# EAGLE board LEDtestBoard (EAGLE 6.4)
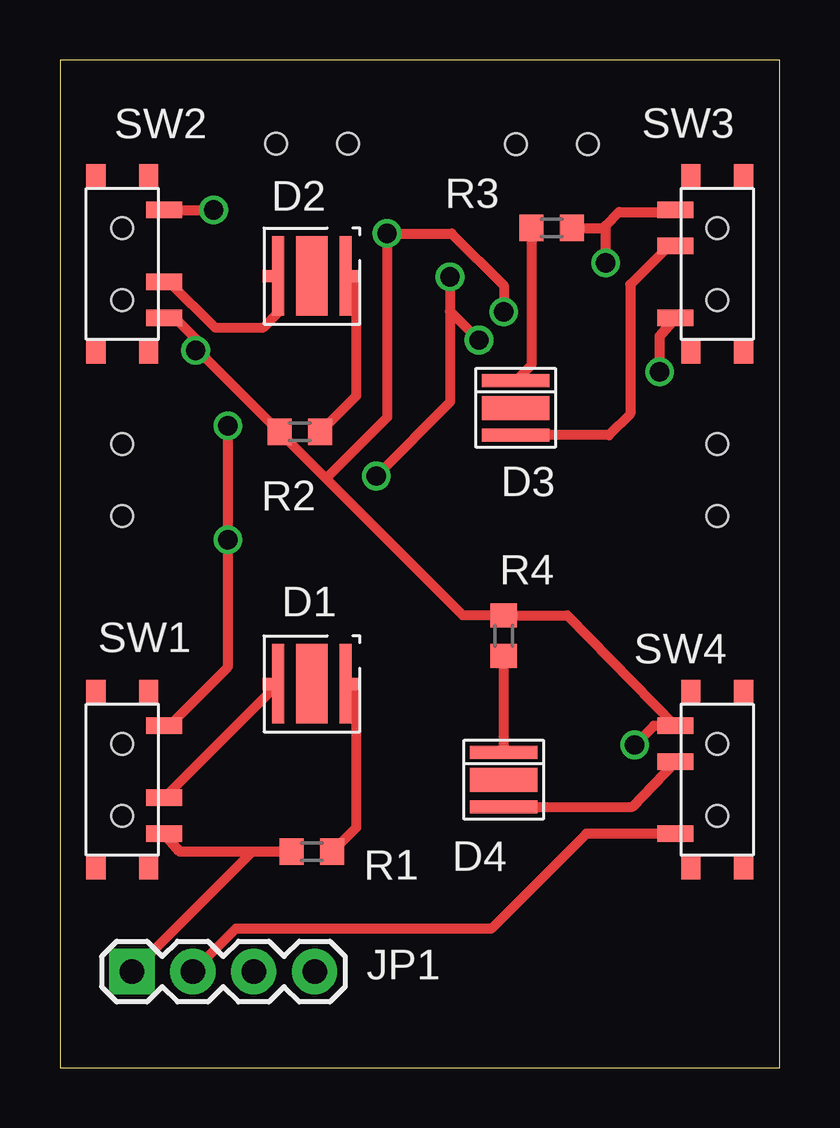
[diagram p0: board, top side]
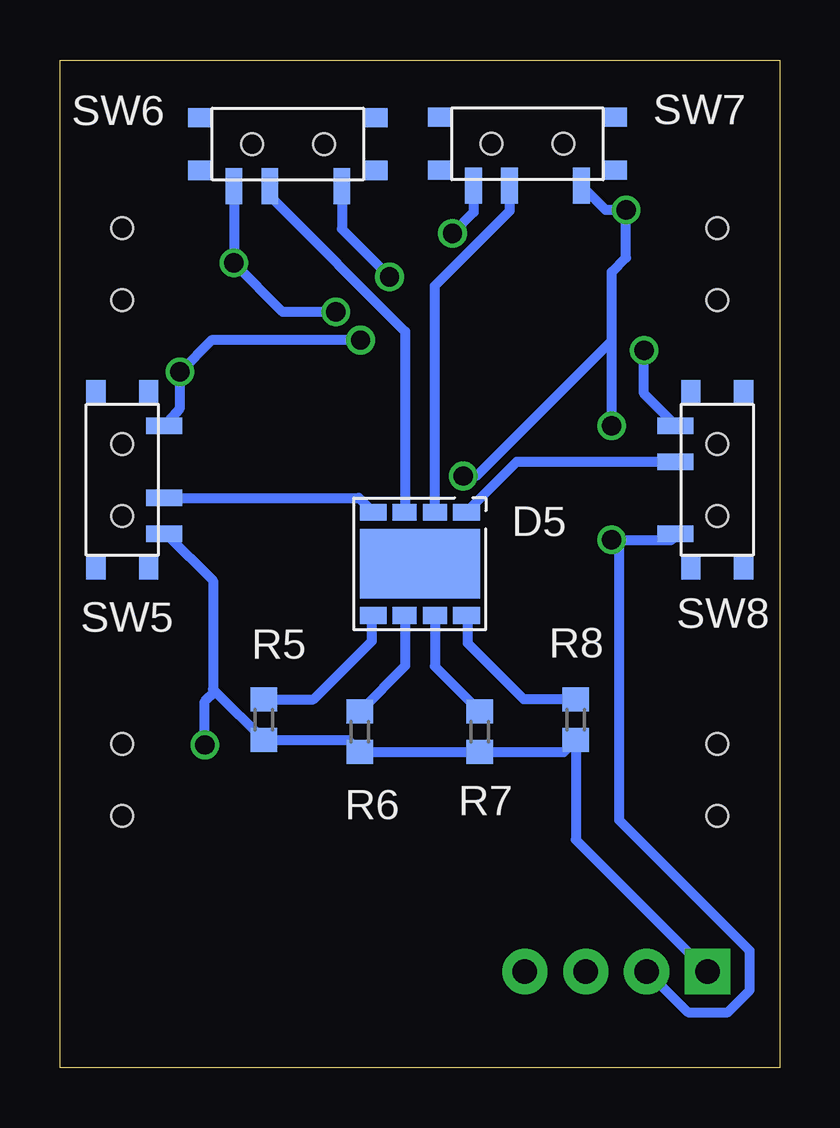
[diagram p1: board, bottom side, seen from below]

Size 30 x 42 mm. Coordinates in mm from the lower left corner, seen from the top.
Outline: 0,0 30,0 30,42 0,42 0,0
Copper layers (1*16): Top 0.0356mm / dielectric 1.5011mm / Bottom 0.0356mm
Design rules "LaenPCBOrder": minimum track width 6mil, minimum drill 13mil, track to track 6mil, track to pad 6mil, pad to pad 6mil, via to via 6mil, smd to smd 6mil, copper to edge 15mil, drill to drill 6mil, minimum pad ring 7mil, minimum via ring 7mil, stop-mask expansion 3mil, vias tented up to drill 0mil, thermal gap 10mil

## Footprints (pad centres in the part's own frame; a part is rotated, then mirrored left to right if it is on the bottom)
SZA05A0A = smd 0.5 x 3.3: 1 -1.4,0; 2 1.4,0 | smd 1.3 x 3.3: 3 0,0 | smd 0.4 x 0.5: 11 -1.85,0; 12 1.85,0
2-SMD-LED-NO-EXP = smd 2.8 x 0.55: 1 0,1.13; 2 0,-1.13 | smd 2.8 x 1: THRM 0,0
8-SMD-LED = smd 0.7 x 1.12: 1 2.15,1.94; 4 2.15,-1.94; 5 -2.15,-1.94; 8 -2.15,1.94 | smd 0.7 x 1: 2 2.15,0.63; 3 2.15,-0.63; 6 -2.15,-0.63; 7 -2.15,0.63 | smd 2.9 x 5: THRM 0,0
1X04 = drill 1.016 pad 1.88 square: 1 0,0 | drill 1.016 pad 1.88: 2 2.54,0; 3 5.08,0; 4 7.62,0
R0603 = smd 1 x 1.1: 1 -0.85,0; 2 0.85,0
PCM12SMTR = smd 0.7 x 1.5: 1 -2.25,1.75; 2 0.75,1.75; 3 2.25,1.75 | smd 1 x 0.8: 4 -3.65,1.1; 5 -3.65,-1.1; 6 3.65,1.1; 7 3.65,-1.1 | hole 0.9: -1.5,0; 1.5,0

## Placement (x,y rotation side)
D1  SZA05A0A  [SZA05A0A]  10.5,16 0 top
D2  SZA05A0A  [SZA05A0A]  10.5,33 0 top
D3  LACN5MFBGB241Z  [2-SMD-LED-NO-EXP]  19,27.5 180 top
D4  LACN5MFBGB241Z  [2-SMD-LED-NO-EXP]  18.5,12 180 top
D5  XLAMP_COLOR  [8-SMD-LED]  15,21 90 bottom
JP1  [1X04]  3,4 0 top
R1  [R0603]  10.5,9 0 top
R2  [R0603]  10,26.5 0 top
R3  [R0603]  20.5,35 180 top
R4  [R0603]  18.5,18 270 top
R5  [R0603]  21.5,14.5 90 bottom
R6  [R0603]  17.5,14 90 bottom
R7  [R0603]  12.5,14 90 bottom
R8  [R0603]  8.5,14.5 90 bottom
SW1  PCM12SMTR  [PCM12SMTR]  2.6,12 270 top
SW2  PCM12SMTR  [PCM12SMTR]  2.6,33.5 270 top
SW3  PCM12SMTR  [PCM12SMTR]  27.4,33.5 90 top
SW4  PCM12SMTR  [PCM12SMTR]  27.4,12 90 top
SW5  PCM12SMTR  [PCM12SMTR]  27.4,24.5 270 bottom
SW6  PCM12SMTR  [PCM12SMTR]  20.5,38.5 180 bottom
SW7  PCM12SMTR  [PCM12SMTR]  10.51,38.51 180 bottom
SW8  PCM12SMTR  [PCM12SMTR]  2.6,24.5 90 bottom

## Library data of the parts
D1-D5 SW1-SW8 = freddyLibr
JP1 = SparkFun-Connectors
R1-R8 = resistor

## Nets
GND: JP1.1 R1.1 R2.1 R3.1 R4.1 R5.1 R6.1 R7.1 R8.1 SW1.3 SW2.3 SW3.3 SW4.3 SW5.3 SW6.3 SW7.3 SW8.3
N$1: JP1.2 SW1.1 SW2.1 SW3.1 SW4.1 SW5.1 SW6.1 SW7.1 SW8.1
N$2: D1.2 D1.12 R1.2
N$3: D1.1 D1.11 SW1.2
N$4: D2.1 D2.11 SW2.2
N$5: D2.2 D2.12 R2.2
N$7: D3.2 R3.2
N$8: D3.1 SW3.2
N$9: D4.1 SW4.2
N$10: D4.2 R4.2
N$13: D5.1 SW5.2
N$14: D5.2 SW6.2
N$15: D5.3 SW7.2
N$16: D5.4 SW8.2
N$17: D5.8 R5.2
N$18: D5.7 R6.2
N$19: D5.6 R7.2
N$20: D5.5 R8.2

## Tracks (layer width: path | path; a pad name or v marks a point on that pad's centre or on a via)
GND  (via drill 0.8)
  Top 0.406: SW1.3 4.99,9 R1.1 8,9 JP1.1 | R3.1 22.65,35 22.75,35.1 | 22.75,35.1 23.31,35.66 25.66,35.66 SW3.3 | v23.96,13.45 24.76,14.25 SW4.3 21.15,18.85 R4.1 16.8,18.85 11.1,24.55 | 11.1,24.55 R2.1 5.65,30 | v5.65,29.9 5.65,30 | SW2.3 4.26,31.24 4.8,31.24 5.65,30.39 5.65,30 | v22.75,33.54 22.75,35.1 | 11.1,24.55 13.64,27.1 v13.64,34.77 16.33,34.77 18.5,32.6 v18.5,31.5
  Bottom 0.406: SW5.3 25.57,22.25 23.62,20.3 23.62,15.77 23.54,15.69 | 23.54,15.69 R5.1 18,13.65 R6.1 R7.1 9,13.15 R8.1 8.5,9.5 JP1.1 | v23.96,13.45 23.96,15.26 23.54,15.69 | SW8.3 4.3,26.75 5.65,28.1 v5.65,29.9 | SW6.3 v22.75,33.54 20.71,31.5 v18.5,31.5 | SW7.3 12.76,35.65 v13.64,34.77
N$1  (via drill 0.8)
  Top 0.406: SW1.1 4.55,14.25 7,16.7 v7,22 v7,26.75 | v25,29 25,30.5 SW3.1 | SW2.1 v6.4,35.75 | v17.47,30.32 16.26,31.53 v16.26,32.96 16.26,27.73 v13.19,24.66 | SW4.1 21.94,9.75 17.98,5.79 7.33,5.79 JP1.2
  Bottom 0.406: SW8.1 4.5,22 v7,22 6.68,21.68 6.68,10.31 1.24,4.87 1.24,3.22 2.15,2.31 3.82,2.31 5.51,4 JP1.2 | SW5.1 25,27.5 v25,29 23.68,30.32 v17.47,30.32 | SW7.1 7.25,35.75 v6.4,35.75 6.4,33.76 7,33.16 7,30.3 | SW6.1 18.25,34.95 v16.26,32.96 | v7,26.75 7,30.3 | v13.19,24.66 12.64,24.66 7,30.3
N$2
  Top 0.406: R1.2 12.35,10 D1.12 D1.2
N$3
  Top 0.406: SW1.2 D1.1 D1.11
N$4
  Top 0.406: SW2.2 4.56,32.75 6.46,30.85 8.48,30.85 9.09,31.46 D2.1 D2.11
N$5
  Top 0.406: R2.2 12.35,28 D2.12 D2.2
N$7
  Top 0.406: R3.2 19.65,29.28 D3.2
N$8
  Top 0.406: SW3.2 25.39,34.25 23.78,32.64 23.78,27.25 22.89,26.36 D3.1
N$9
  Top 0.406: D4.1 23.87,10.87 SW4.2
N$10
  Top 0.406: D4.2 R4.2
N$13
  Bottom 0.406: SW5.2 17.54,23.75 D5.1
N$14
  Bottom 0.406: SW6.2 21.25,36.32 15.61,30.68 15.61,23.17 D5.2
N$15
  Bottom 0.406: SW7.2 11.26,35.7 14.38,32.58 D5.3
N$16
  Bottom 0.406: SW8.2 10.96,25.25 D5.4
N$17
  Bottom 0.406: R5.2 19.43,15.35 17,17.78 17,18.79 D5.8
N$18
  Bottom 0.406: D5.7 15.63,18.72 15.61,18.7 15.61,16.74 R6.2
N$19
  Bottom 0.406: D5.6 14.37,16.72 R7.2
N$20
  Bottom 0.406: R8.2 10.66,15.35 12.99,17.68 12.99,18.78 D5.5

## Text on the board
tDocu: F. Lee / LEDtestBoard / 2/25/2014